# Altium PCB IAQ_PCB.pcbdoc
Units mil, origin at the board's own origin, x right, y up, seen from the top; angles counter-clockwise.
Board outline 3215 x 3990 mil, 2 copper layers (Top Layer, Bottom Layer); 43 components, 55 nets, 152 pads, 83 vias.
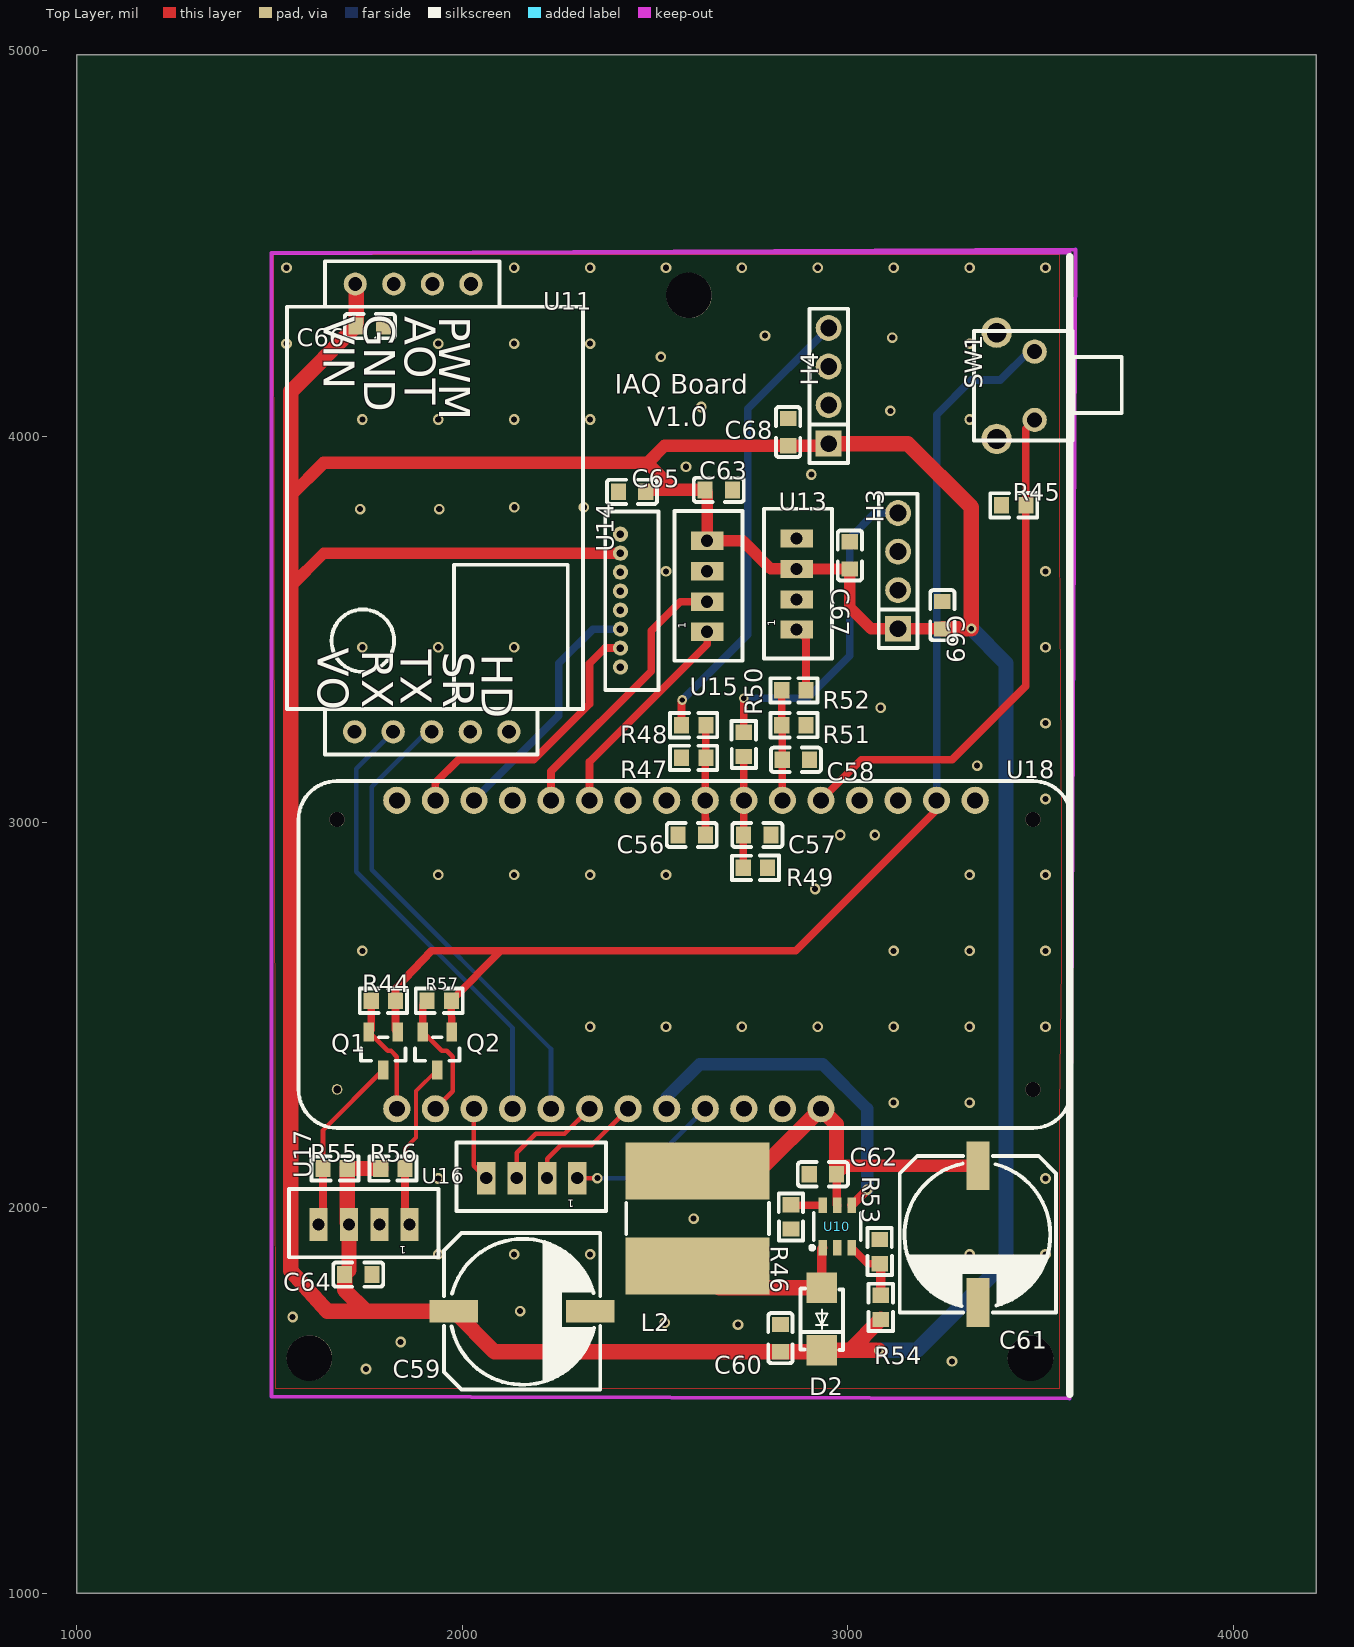
[diagram p0: Top Layer view]
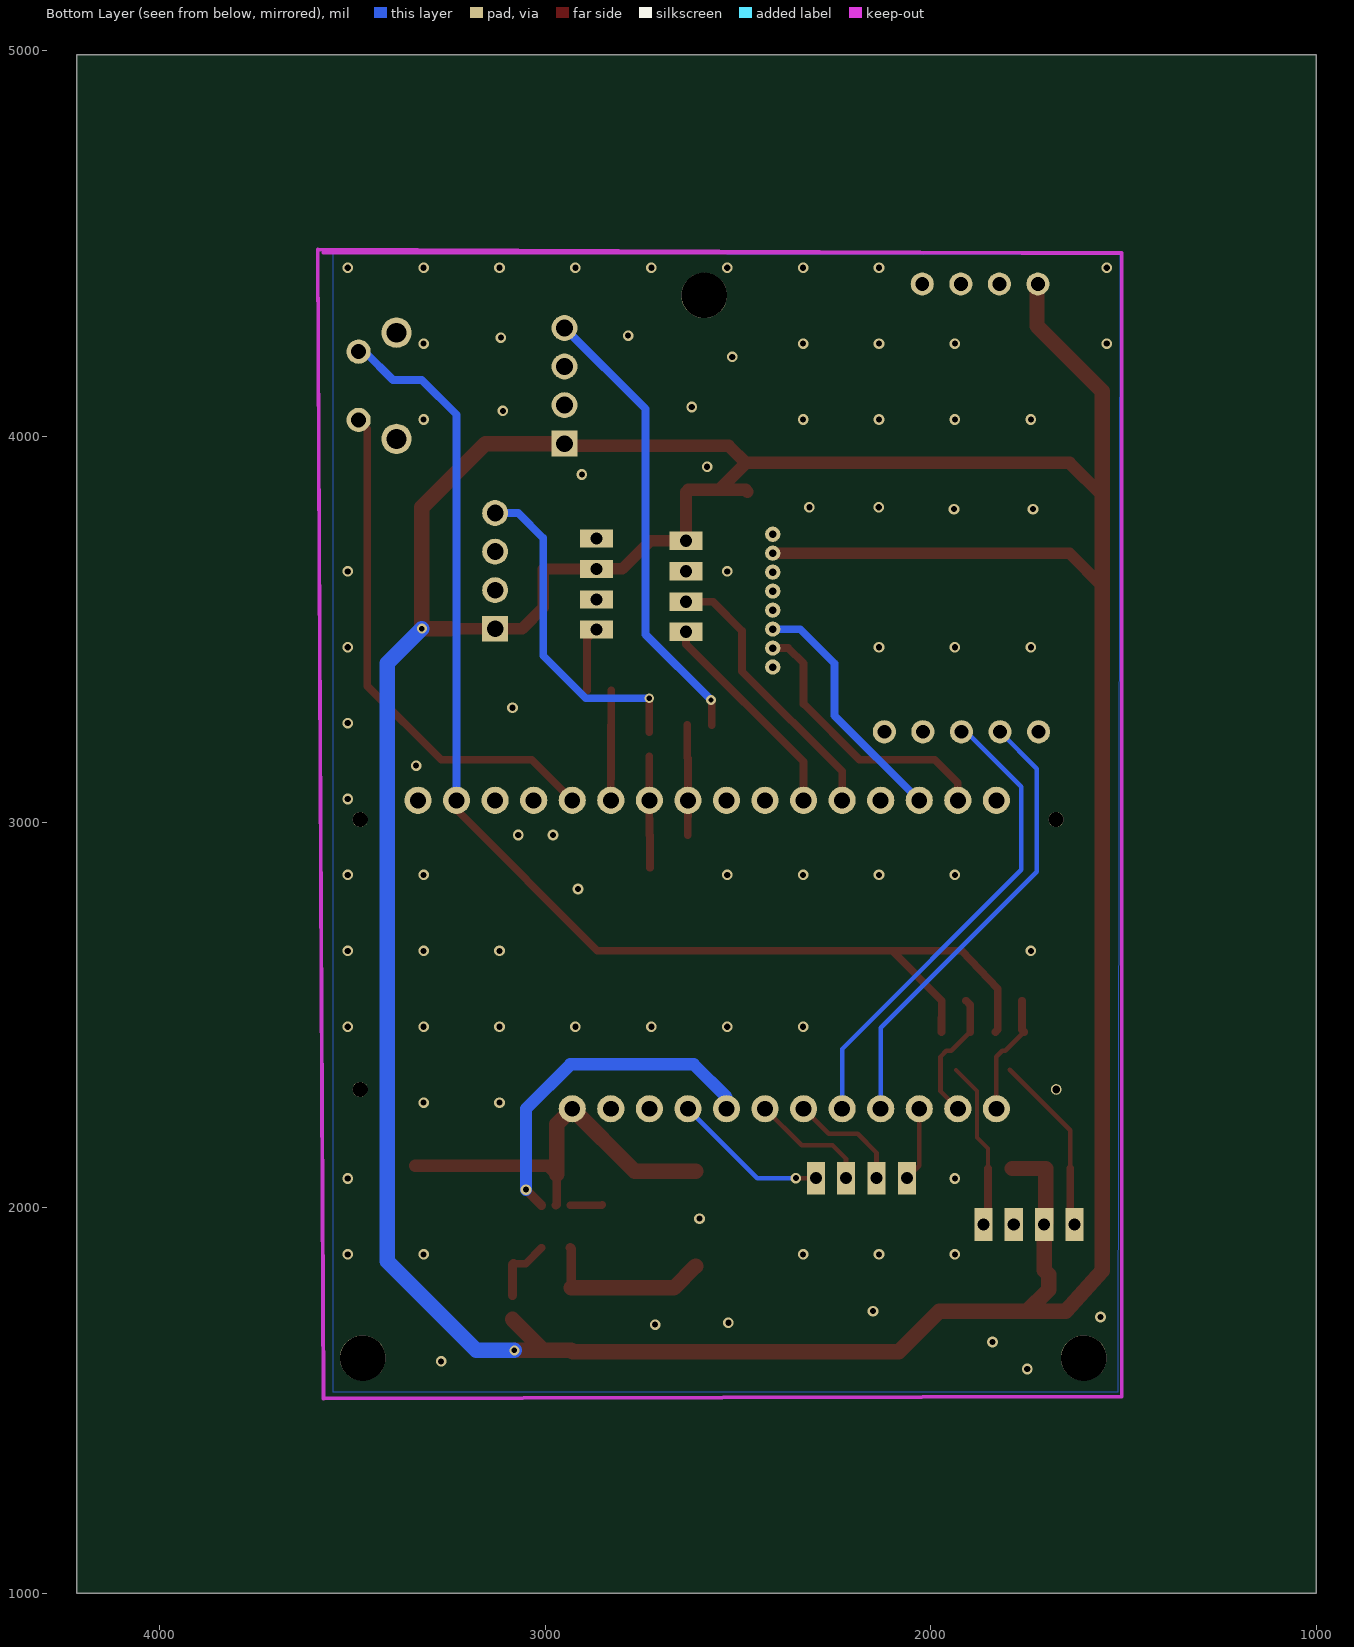
[diagram p1: Bottom Layer view, seen from below]

## Layer stack, top to bottom
Top Layer: signal copper (thickness not stored)
Dielectric: dielectric 12.6, FR-4, Dk 4.8
Bottom Layer: signal copper (thickness not stored)

## Board outline
4215,1000 1000,1000 1000,4990 4215,4990

## Components (designator, comment, footprint, x,y, rotation, side; value= is the part's Value field where it differs from the comment)
C56 "100nF" C0603 2595,2966.5 r0 top
C57 "100nF" C0603 2765,2966.5 r180 top
C58 "100nF" C0603 2865,3161.5 r180 top
C59 "220uF" CAP-SMD_BD10.0-L10.3-W10.3-FD 2155,1731.5 r0 top
C60 "100nF" C0603 2825,1661.5 r270 top
C61 "220uF" CAP-SMD_BD10.0-L10.3-W10.3-FD 3337.3,1931.05 r270 top
C62 "100nF" C0603 2935,2086.5 r0 top
C63 "100nF" C0603 2665,3861.5 r180 top
C64 "100nF" C0603 1730,1826.5 r180 top
C65 "100nF" C0603 2440,3856.5 r0 top
C66 "100nF" C0603 1760,4286.5 r180 top
C67 "100nF" C0603 3005,3691.5 r270 top
C68 "100nF" C0603 2845,4011.5 r270 top
C69 "100nF" C0603 3245,3536.5 r270 top
D2 "SS54_C22452" SMA_L4.3-W2.6-LS5.2-FD 2932.3,1711.05 r270 top
H3 "MQ_7" DIP-1X4P2.54 3130,3651.5 r90 top
H4 "MQ_2" DIP-1X4P2.54 2950,4131.5 r90 top
L2 "3.3uH" IND-SMD_L10.0-W9.0 2610,1971.5 r90 top
Q1 "BSS138LT1G" SOT-23-3_L2.9-W1.6-P1.90-LS2.8-BR 1795,2406.5 r90 top
Q2 "BSS138LT1G" SOT-23-3_L2.9-W1.6-P1.90-LS2.8-BR 1935,2406.5 r90 top
R44 "10K" R0603 1795,2536.5 r0 top
R45 "100K" R0603 3430,3821.5 r0 top
R46 "22K" R0603 2852.3,1976.05 r90 top
R47 "22K" R0603 2600,3166.5 r180 top
R48 "33K" R0603 2600,3251.5 r180 top
R49 "22K" R0603 2760,2881.5 r180 top
R50 "33K" R0603 2730,3201.5 r90 top
R51 "22K" R0603 2860,3251.5 r180 top
R52 "33K" R0603 2860,3341.5 r0 top
R53 "10K" R0603 3082.3,1886.05 r270 top
R54 "75K" R0603 3085,1741.5 r270 top
R55 "10K" R0603 1670,2101.5 r0 top
R56 "10K" R0603 1820,2101.5 r180 top
R57 "10K" R0603 1940,2536.5 r0 top
SW1 "TL1105XF160Q" KEY-TH_TL1105XF160Q 3435,4131.5 r90 top
U10 "FP6291LR-G1" SOT-23-6_L2.9-W1.6-P0.95-LS2.8-BL 2972.3,1951.05 r0 top
U11 "MH-Z19B" MH-Z19BCOR 1545,4336.5 r270 top
U13 "HCHO" JST_B4B-PH_HEADER#1 2865,3616.5 r270 top
U14 "HPM" "1X8 1.25MM" 2410,3746.5 r270 top
U15 "ePaper2" JST_B4B-PH_HEADER#2 2635,3611.5 r270 top
U16 "ePaper1" JST_B4B-PH_HEADER#2 2180,2076.5 r0 top
U17 "SVM30" JST_B4B-PH_HEADER#2 1745,1956.5 r0 top
U18 "ADAFRUIT FEATHER ESP32" "ADAFRUIT FEATHER ESP32" 3580,3106.5 r180 top

## Footprints (in the part's own frame and the unit in brackets; to place one, negate y for a bottom-side part, rotate by r counter-clockwise, add the part's x,y. Pads: shape width x height; smd on the part's side, far side on the other; paste and mask are expansions set on the pad)
"1X8 1.25MM" [mm]
  round 1 hole 0.5: 1(0,0) 2(1.25,0) 3(2.499,0) 4(3.749,0) 5(5.001,0) 6(6.251,0) 7(7.501,0) 8(8.75,0)
  silkscreen extent -1.5,-1 10.25,2.5
"ADAFRUIT FEATHER ESP32" [mil]
  round 70.5 hole 41.4: 1(250,50) 2(350,50) 3(450,50) 4(550,50) 5(650,50) 6(750,50) 7(850,50) 8(950,50) 9(1050,50) 10(1150,50) 11(1250,50) 12(1350,50) 13(1450,50) 14(1550,50) 15(1650,50) 16(1750,50) 17(1750,850) 18(1650,850) 19(1550,850) 20(1450,850) 21(1350,850) 22(1250,850) 23(1150,850) 24(1050,850) 25(950,850) 26(850,850) 27(750,850) 28(650,850)
  round 39.37 hole 39.37: 29(100,800) 29(100,100) 29(1905,100)
  round 27.56 hole 19.69: 29(1905,800)
  silkscreen extent 0,0 2005,900
C0603 [mm]
  rect 1x1.1 smd: 1(-0.9,0) 2(0.9,0)
  silkscreen extent -1.65,-0.8 1.65,0.8
CAP-SMD_BD10.0-L10.3-W10.3-FD [mm]
  rect 3.2x1.5 smd: 1(-4.5,0) 2(4.5,0)
  silkscreen extent -5.15,-5.15 5.15,5.15
DIP-1X4P2.54 [mm]
  rect 1.7x1.7 hole 1.1: 1(-3.81,0)
  round 1.7 hole 1.1: 2(-1.27,0) 3(1.27,0) 4(3.81,0)
  silkscreen extent -5.08,-1.27 5.08,1.27
IND-SMD_L10.0-W9.0 [mm]
  rect 3.75x9.5 smd: 1(-3.125,0) 2(3.125,0)
  silkscreen extent -1.02,-4.7 1.02,4.7
JST_B4B-PH_HEADER#1 [mil]
  rect 47.2x85 hole 31.4: P1(117,2) P2(39,2) P3(-40,2) P4(-119,2)
  silkscreen extent -196,-83 192,94
JST_B4B-PH_HEADER#2 [mil]
  rect 47.2x85 hole 31.4: P1(118,0) P2(40,0) P3(-39,0) P4(-118,0)
  silkscreen extent -195,-85 193,92
KEY-TH_TL1105XF160Q [mm]
  round 1.6 hole 1: 1(-2.25,-1.25) 2(2.25,-1.25)
  round 2 hole 1.3: 3(-3.5,1.25) 4(3.5,1.25)
  silkscreen extent -3.6,-6.98 3.6,2.75
MH-Z19BCOR [mil]
  round 60 hole 36: 1(1102.36,175.59) 2(1102.36,275.59) 3(1102.36,375.59) 4(1102.36,475.59) 5(1102.36,575.59) 6(-59.06,177.17) 7(-59.06,277.17) 8(-59.06,377.17) 9(-59.06,477.17)
  silkscreen extent -118,0 1161,768
R0603 [mm]
  rect 1x1.1 smd: 1(-0.8,0) 2(0.8,0)
  silkscreen extent -1.55,-0.8 1.55,0.81
SMA_L4.3-W2.6-LS5.2-FD [mm]
  rect 2x2 smd: 1(-2.057,0) 2(2.057,0)
  silkscreen extent -2.01,-1.4 2.03,1.4
SOT-23-3_L2.9-W1.6-P1.90-LS2.8-BR [mm]
  rect 1.25x0.7 smd: 1(1.25,-0.95) 2(1.25,0.95) 3(-1.25,0)
  silkscreen extent -0.65,-1.46 0.9,1.46
SOT-23-6_L2.9-W1.6-P0.95-LS2.8-BL [mm]
  rect 0.55x1 smd: 1(-0.95,-1.4) 2(0,-1.4) 3(0.95,-1.4) 4(0.95,1.4) 5(0,1.4) 6(-0.95,1.4)
  silkscreen extent -1.78,-1.52 1.55,0.9

## Free pads (board coordinates)
  round 118.11 hole 118.11 unplated: ""(1603.43,1609.92) ""(2587.68,4365.83) ""(3473.5,1609.92)

## Via types
v1: diameter 27.56, hole 15.75, Top Layer to Bottom Layer, 79 vias
v2: diameter 25, hole 14, Top Layer to Bottom Layer, 2 vias
v3: diameter 26, hole 14, Top Layer to Bottom Layer, 2 vias

## Nets (pads, with @x,y where several pads share a name; then routed paths per layer and width w, separated by ;. In a path a pad name is that pad's centre, name@x,y a point inside that pad or via, vN(x,y) a via of type N, cw(c..) or ccw(c..) an arc to the next point about the centre after c; other vN are vias at no path point)
3.3V: Q1.1 Q2.1 R44.2 R57.2 SW1.2 U18.2 | length 3322.3
  Top Layer w20: Q1.1 1826.49,2461.61 R44.2 1826.5,2568 1920,2666.5 2100,2666.5 ; Q2.1 R57.2 2100,2666.5 ; U18.2 3230,3031.5 2865,2666.5 2100,2666.5
  Bottom Layer w20: U18.2 3230,4056.5 3320,4146.5 3395,4146.5 3468.6,4220.1 SW1.2
+5V: C59.1 C60.2 C63.2 C64.2 C65.2 C66.2 C67.2 C68.2 C69.2 D2.2 H3.1 H4.1 R54.2 R55.2 R56.2 U11.6 U13.P3 U14.2 U15.P4 U17.P3 | length 11283.1
  Top Layer w30: 1555,3605.3 1555,3611.5 1640,3696.5 U14.2 ; C63.2 2635,3856.07 U15.P4 2727,3729.5 2800,3656.5 U13.P3 C67.2 ; C67.2 3005,3556.5 3060,3501.5 H3.1 C69.2
  Top Layer w32: 1555,3841.13 1555,3846.5 1640,3931.5 2479.83,3931.5 ; C65.2 2480.43,3861.5 C63.2 ; 2549.83,3861.5 2479.83,3931.5 ; H4.1 2944.56,3976.06 C68.2 2524.39,3976.06 2479.83,3931.5
  Top Layer w40: C64.2 1706,1837.94 U17.P3 1701.49,1961.01 R55.2 R56.2 ; C64.2 1694.6,1786.9 1750,1731.5 ; U11.6 1724.57,4393.16 C66.2 ; C66.2 1555,4116.9 1555,1836.5 1650,1731.5 1750,1731.5 ; H4.1 3155,3981.5 3320,3816.5 v3(3320,3501.5) C69.2 ; v3(3080,1630.05) 3005.04,1630.05 ; R54.2 3005.04,1630.05 ; 1750,1731.5 C59.1 2083.27,1626.07 C60.2 2928.32,1626.07 D2.2 3005.04,1630.05
  Bottom Layer w40: v3(3080,1630.05) 3178.55,1630.05 3410,1861.5 3410,3411.5 v3(3320,3501.5)
GND: C56.1 C57.1 C58.1 C59.2 C60.1 C61.2 C62.1 C63.1 C64.1 C65.1 C66.1 C67.1 C68.1 C69.1 H3.2 H4.2 R45.1 R46.1 R47.2 R49.1 R51.1 R53.1 U10.2 U11.7 U13.P4 U14.8 U15.P3 U17.P2 U18.4
  other v1: 1750,1581.5 3270,1601.5 1840,1651.5 2715,1696.5 2525,1701.5 1560,1716.5 2150,1731.5 1937.52,1878.67 2134.37,1878.67 2331.22,1878.67 3315.47,1878.67 3512.33,1878.67 2600,1971.5 1937.52,2075.52 3512.33,2075.52 3118.62,2272.37 3315.47,2272.37 2331.22,2469.22 2528.07,2469.22 2724.92,2469.22 2921.77,2469.22 3118.62,2469.22 3315.47,2469.22 3512.33,2469.22 1740.67,2666.07 3118.62,2666.07 3315.47,2666.07 3512.33,2666.07 2915,2826.5 1937.52,2862.92 2134.37,2862.92 2331.22,2862.92 2528.07,2862.92 3315.47,2862.92 3512.33,2862.92 2980,2966.5 3070,2966.5 3512.33,3059.77 3335,3146.5 3512.33,3256.62 3085,3296.5 1740.67,3453.47 1937.52,3453.47 2134.37,3453.47 3512.33,3453.47 2528.07,3650.32 3512.33,3650.32 1735,3811.5 1940,3811.5 2135,3816.5 2315,3816.5 2905,3901.5 2580,3921.5 1740.67,4044.02 1937.52,4044.02 2134.37,4044.02 2331.22,4044.02 3315.47,4044.02 3110,4066.5 2620,4076.5 2515,4206.5 1543.82,4240.87 1937.52,4240.87 2134.37,4240.87 2331.22,4240.87 3315.47,4240.87 3115,4256.5 2785,4261.5 1543.82,4437.72 2134.37,4437.72 2331.22,4437.72 2528.07,4437.72 2724.92,4437.72 2921.77,4437.72 3118.62,4437.72 3315.47,4437.72 3512.33,4437.72
H3_3: H3.3
H3_4: H3.4 R50.2 | length 866
  Top Layer w20: R50.2 v2(2730,3321.5)
  Bottom Layer w20: v2(2730,3321.5) 2895,3321.5 3005,3431.5 3005,3736.5 3070,3801.5 H3.4
H4_3: H4.3
H4_4: H4.4 R48.2 | length 1188
  Top Layer w20: R48.2 2568.5,3315 v2(2570,3316.5)
  Bottom Layer w20: v2(2570,3316.5) 2740,3486.5 2740,4071.5 H4.4
Q2_2: Q2.2 R57.1 U18.18 | length 342.9
  Top Layer w12: Q2.2 1946.8,2406.5 1960,2406.5 1975,2391.5 1975,2301.5 U18.18
  Top Layer w20: Q2.2 1897.6,2525.6 R57.1
Q2_3: Q2.3 R56.1 U17.P1 | length 440.2
  Top Layer w10: R56.1 1851.5,2153 1880,2181.5 1880,2302.3 Q2.3
  Top Layer w20: R56.1 1851.5,1968 U17.P1
R44_1: Q1.2 R44.1 U18.17 | length 317.2
  Top Layer w12: Q1.2 1806.8,2406.5 1815,2406.5 1830,2391.5 U18.17
  Top Layer w20: Q1.2 1763.5,2461.6 R44.1
R55_1: Q1.3 R55.1 U17.P4 | length 470.4
  Top Layer w12: R55.1 1638.5,2200.8 Q1.3
  Top Layer w20: U17.P4 1638.5,1968 R55.1
S$30: 
S$34: 
S$36: 
S$16203: 
SW1_3: SW1.3
SW1_4: SW1.4
U10_1: D2.1 L2.1 U10.1 | length 450.6
  Top Layer w24: D2.1 2932.3,1893.33 U10.1
  Top Layer w40: L2.1 2666.42,1792.05 D2.1
U10_3: R53.2 R54.1 U10.3 | length 172.4
  Top Layer w20: U10.3 3051.07,1854.55 R53.2
  Top Layer w24: R53.2 3085,1851.85 R54.1
U10_6: R46.2 U10.6 | length 83.2
  Top Layer w20: R46.2 2853.67,2006.17 U10.6
U11_1: U11.1
U11_2: U11.2 U18.20 | length 1185
  Bottom Layer w12: U11.2 1725,3138.55 1725,2871.5 2130,2466.5 U18.20
U11_3: U11.3 U18.21 | length 1242.3
  Bottom Layer w12: U11.3 1907.6,3234.1 1765,3091.5 1765,2876.5 2230,2411.5 U18.21
U11_4: U11.4
U11_5: U11.5
U11_8: U11.8
U11_9: U11.9
U13_P1: R52.2 U13.P1 | length 168.1
  Top Layer w20: U13.P1 2891.49,3475.01 R52.2
U13_P2: U13.P2
U14_1: U14.1
U14_3: U14.3
U14_4: U14.4
U14_5: U14.5
U18_1: U18.1
U18_3: U18.3
U18_5: R45.2 SW1.1 U18.5 | length 1353.6
  Top Layer w20: U18.5 3035,3161.5 3270,3161.5 3461.5,3353 R45.2 3461.5,4020.2 SW1.1
U18_6: C58.2 R51.2 R52.1 U18.6 | length 285.4
  Top Layer w20: R52.1 R51.2 2829.57,3250.44 C58.2 ; C58.2 U18.6
U18_7: C57.2 R49.2 R50.1 U18.7 | length 288.9
  Top Layer w20: R49.2 2728.51,2965.44 C57.2 ; C57.2 U18.7 R50.1
U18_8: C56.2 R47.1 R48.1 U18.8 | length 285.6
  Top Layer w20: C56.2 U18.8 2630,3165 R47.1 R48.1
U18_9: U18.9
U18_10: U18.10
U18_11: U15.P1 U18.11 | length 563.3
  Top Layer w20: U18.11 2330,3156.5 2635,3461.5 U15.P1
U18_12: U15.P2 U18.12 | length 723.8
  Top Layer w20: U18.12 2230,3131.5 2490,3391.5 2490,3496.5 2565,3571.5 U15.P2
U18_13: U18.13
U18_14: U14.6 U18.14 | length 643
  Bottom Layer w20: U18.14 2250,3276.5 2250,3411.5 2338.9,3500.4 U14.6
U18_15: U14.7 U18.15 | length 731.4
  Top Layer w20: U18.15 1930,3101.5 1990,3161.5 2185,3161.5 2330,3306.5 2330,3411.5 2369.7,3451.2 U14.7
U18_16: U18.16
U18_19: U16.P4 U18.19 | length 193.3
  Top Layer w12: U18.19 2030,2108.5 U16.P4
U18_22: U16.P3 U18.22 | length 302.2
  Top Layer w12: U16.P3 2141,2142.5 2190,2191.5 2265,2191.5 U18.22
U18_23: U16.P2 U18.23 | length 313.8
  Top Layer w12: U16.P2 2220,2126.5 2255,2161.5 2335,2161.5 U18.23
U18_24: U10.4 U18.24 | length 899.9
  Top Layer w24: U10.4 v1(3050,2046.5)
  Bottom Layer w32: U18.24 2530,2286.5 2615,2371.5 2935,2371.5 3050,2256.5 v1(3050,2046.5)
U18_25: U16.P1 U18.25 | length 406.6
  Top Layer w12: U16.P1 v1(2350,2076.5)
  Bottom Layer w12: v1(2350,2076.5) 2450,2076.5 U18.25
U18_26: U18.26
U18_27: U18.27
VBAT: C61.1 C62.2 L2.2 U10.5 U18.28 | length 1030.8
  Top Layer w22: C62.2 2970.43,2008.03 U10.5
  Top Layer w32: C62.2 2992.15,2108.21 C61.1
  Top Layer w40: L2.2 2768.03,2094.53 U18.28 2970.44,2216.06 C62.2
pads on no net: U18.29

## Polygon pours and split planes (outlines as drawn)
GND on Bottom Layer (solid): 1510,4471.5 1515,1521.5 3550,1521.5 3550,4471.5 3550,4476.5
GND on Top Layer (solid): 1510,4471.5 1515,1531.5 3550,1531.5 3550,2261.5 3555,2626.5 3555,2986.5 3550,3726.5 3550,4471.5

## Silkscreen, mask and mechanical layers (free items; w line width, h text height)
Top Overlay:
  lines w20 net S$16203: 3575,1516.5 3575,4466.5
  text "IAQ Board" at 2395,4111.5 h50
  text "V1.0" at 2480,4026.5 h50
Document:
  lines w0.1: 2606.5,2994 2608.5,2996

## Text inside footprints (layer, text, board x,y; h text height)
U11: Top Overlay "HD" at 2050,3436.5 h80 r270; Top Overlay "SR" at 1950,3441.5 h80 r270; Top Overlay "TX" at 1840,3446.5 h80 r270; Top Overlay "RX" at 1740,3446.5 h80 r270; Top Overlay "VO" at 1625,3451.5 h80 r270; Top Overlay "PWM" at 1940,4311.5 h80 r270; Top Overlay "AOT" at 1850,4311.5 h80 r270; Top Overlay "GND" at 1745,4316.5 h80 r270; Top Overlay "VIN" at 1640,4311.5 h80 r270
U13: Top Overlay "1" at 2811,3507.5 h20 r90
U15: Top Overlay "1" at 2579,3501.5 h20 r90
U16: Top Overlay "1" at 2290,2020.5 h20 r180
U17: Top Overlay "1" at 1855,1900.5 h20 r180